# Altium PCB PCB_TPIC6B595D.PcbDoc
Units mil, origin at the board's own origin, x right, y up, seen from the top; angles counter-clockwise.
Board outline not stored, 2 copper layers (Top Layer, Bottom Layer); 3 components, 0 nets, 24 pads, 2 vias.
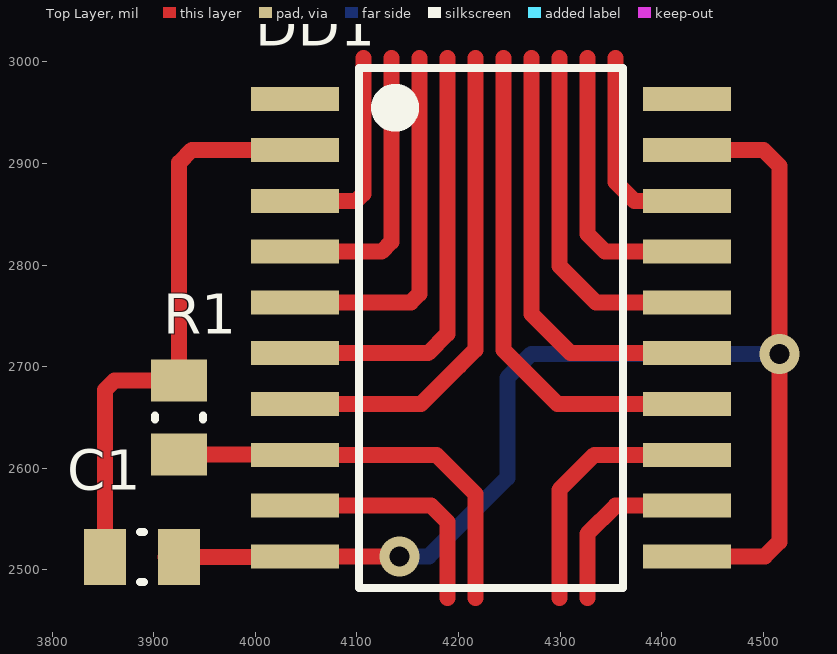
[diagram p0: Top Layer view]
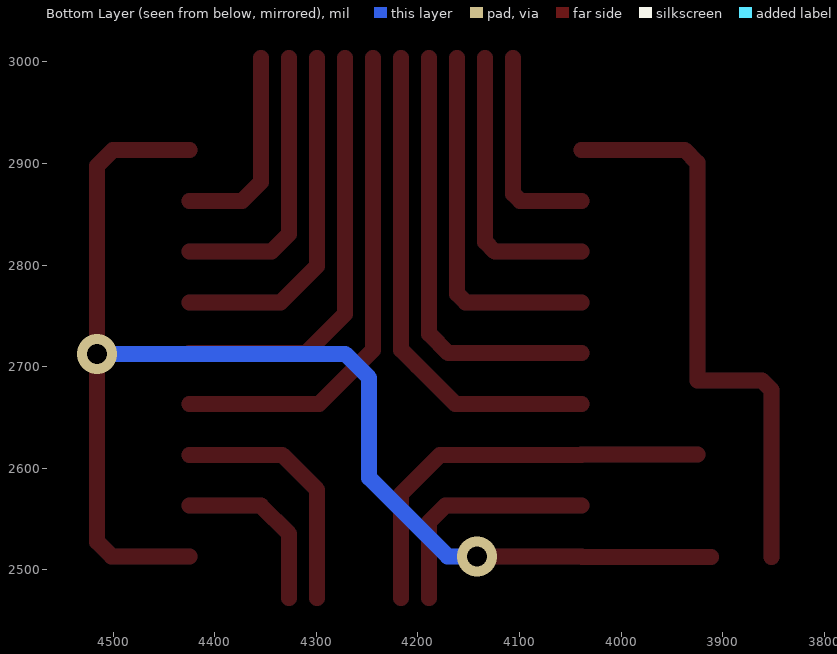
[diagram p1: Bottom Layer view, seen from below]

## Layer stack, top to bottom
Top Solder: solder mask 0.4, Solder Resist, Dk 3.5
Top Layer: signal copper 1.4
Dielectric 1: dielectric 12.6, FR-4, Dk 4.8
Bottom Layer: signal copper 1.4
Bottom Solder: solder mask 0.4, Solder Resist, Dk 3.5

## Components (designator, comment, footprint, x,y, rotation, side; value= is the part's Value field where it differs from the comment)
C1 "100nF" Capacitor_0805 3888.58,2512.5 r180 top
DD1 "TPIC6B595D" SOIC-20 4232.05,2738.27 r0 top
R1 "10k" RESISTOR_SMD0805 3925,2650 r90 top

## Footprints (in the part's own frame and the unit in brackets; to place one, negate y for a bottom-side part, rotate by r counter-clockwise, add the part's x,y. Pads: shape width x height; smd on the part's side, far side on the other; paste and mask are expansions set on the pad)
Capacitor_0805 [mm]
  rect 1.05x1.4 smd: 1(-0.925,0) 2(0.925,0)
  silkscreen extent -0.05,-0.63 0.05,0.63, body extent -1,-0.63 1,0.63, height 1.3
RESISTOR_SMD0805 [mm]
  rect 1.05x1.4 smd: 1(-0.925,0) 2(0.925,0)
  silkscreen extent -0.05,-0.6 0.05,0.6, body extent -1.1,-0.7 1.1,0.7, height 0.5
SOIC-20 [mm]
  rect 2.2x0.6 smd: 1(-4.9,5.715) 2(-4.9,4.445) 3(-4.9,3.175) 4(-4.9,1.905) 5(-4.9,0.635) 6(-4.9,-0.635) 7(-4.9,-1.905) 8(-4.9,-3.175) 9(-4.9,-4.445) 10(-4.9,-5.715) 11(4.9,-5.715) 12(4.9,-4.445) 13(4.9,-3.175) 14(4.9,-1.905) 15(4.9,-0.635) 16(4.9,0.635) 17(4.9,1.905) 18(4.9,3.175) 19(4.9,4.445) 20(4.9,5.715)
  silkscreen extent -3.3,-6.5 3.3,6.5, body extent -5.3,-6.5 5.3,6.5, height 2.59

## Part data
C1: library part Capacitor_0805
R1: library part Resistor_0805

## Via types
v1: diameter 39.37, hole 19.68, Top Layer to Bottom Layer, 2 vias

## Nets (pads, with @x,y where several pads share a name; then routed paths per layer and width w, separated by ;. In a path a pad name is that pad's centre, name@x,y a point inside that pad or via, vN(x,y) a via of type N, cw(c..) or ccw(c..) an arc to the next point about the centre after c; other vN are vias at no path point)
pads on no net: C1.1 C1.2 DD1.1 DD1.2 DD1.3 DD1.4 DD1.5 DD1.6 DD1.7 DD1.8 DD1.9 DD1.10 DD1.11 DD1.12 DD1.13 DD1.14 DD1.15 DD1.16 DD1.17 DD1.18 DD1.19 DD1.20 R1.1 R1.2
copper on no net: | length 6470.7
  Top Layer w15.75: 3852.17,2512.5 3852.17,2677.17 3861.42,2686.42 3925,2686.42 3925,2900.77 3937.5,2913.27 4039.13,2913.27 ; 3911.42,2512.5 3925,2512.5 4038.37,2512.5 4039.13,2513.27 4139.25,2513.27 v1@4141.73,2515.75 ; 3925,2613.58 4038.82,2613.58 4039.13,2613.27 4178.07,2613.27 4216.54,2574.8 4216.54,2472.52 ; 4039.13,2563.27 4172.95,2563.27 ; 4039.13,2663.27 4163.27,2663.27 4200.79,2700.79 4216.54,2716.54 4216.54,2842.52 4216.54,3004.02 ; 4039.13,2713.27 4169.96,2713.27 4188.98,2732.28 4188.98,3004.02 ; 4039.13,2763.27 4153.03,2763.27 4161.42,2771.65 4161.42,3004.02 ; 4039.13,2813.27 4124.29,2813.27 4133.86,2822.83 4133.86,2897.64 4133.86,3004.02 ; 4039.13,2863.27 4099.49,2863.27 4106.3,2870.08 4106.3,3003.94 ; 4141.73,2563.27 4172.95,2563.27 ; 4188.98,2472.52 4188.98,2547.24 4172.95,2563.27 ; 4244.09,3003.94 4244.09,2862.2 4244.09,2716.54 4297.36,2663.27 4424.96,2663.27 ; 4271.65,3004.02 4271.65,2751.97 4310.35,2713.27 4424.96,2713.27 ; 4299.21,2472.52 4299.21,2578.74 4333.74,2613.27 4424.96,2613.27 ; 4299.21,3004.02 4299.21,2893.7 4299.21,2799.21 4335.16,2763.27 4424.96,2763.27 ; 4326.77,2472.52 4326.77,2535.43 4354.61,2563.27 4424.96,2563.27 ; 4326.77,3004.02 4326.77,2925.2 4326.77,2830.71 4344.21,2813.27 4424.96,2813.27 ; 4354.33,3004.02 4354.33,2881.89 4372.95,2863.27 4424.96,2863.27 ; 4424.96,2513.27 4501.46,2513.27 4515.75,2527.56 v1(4515.75,2712.6) 4515.75,2897.64 4500.12,2913.27 4424.96,2913.27
  Bottom Layer w15.75: v1(4141.73,2513.27) 4170.75,2513.27 4248.03,2590.55 4248.03,2688.98 4271.65,2712.6 v1(4515.75,2712.6)